# Allegro board ISOLATED_USB_PROGRAMMER_FOR_LPGBT.brd
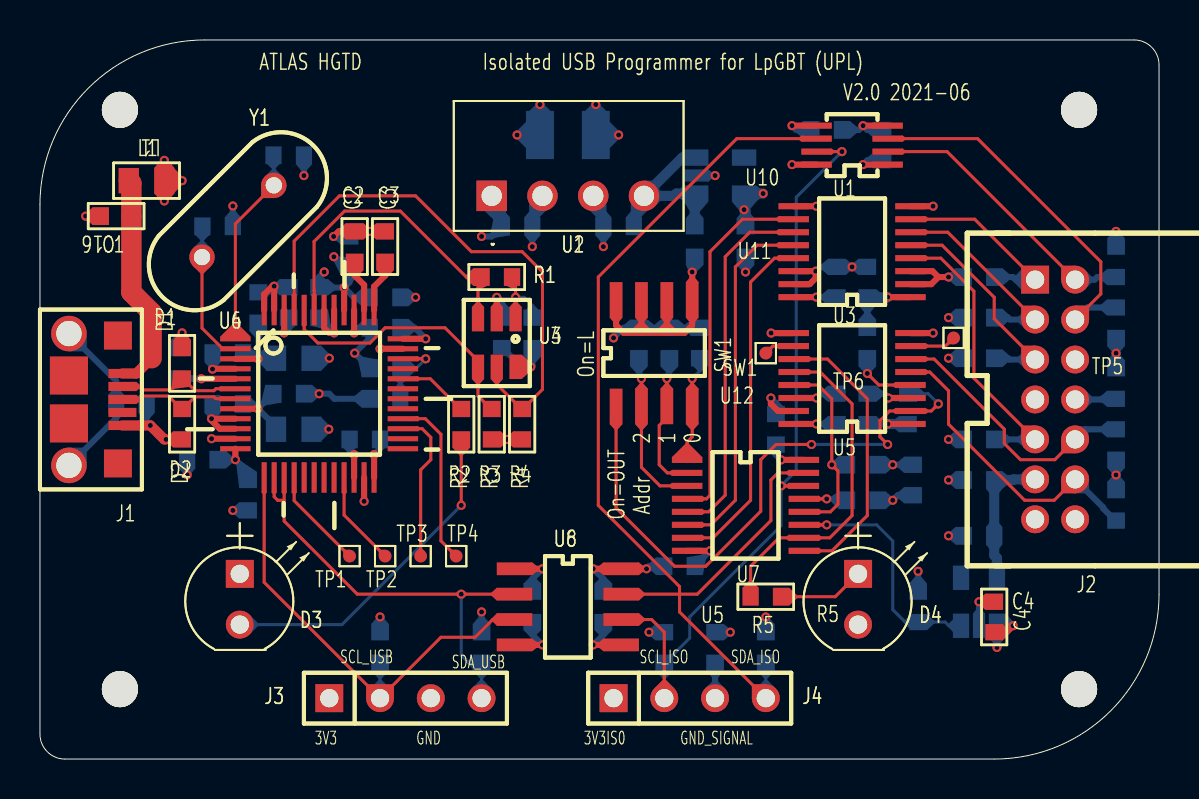
[diagram p0: board, top side]
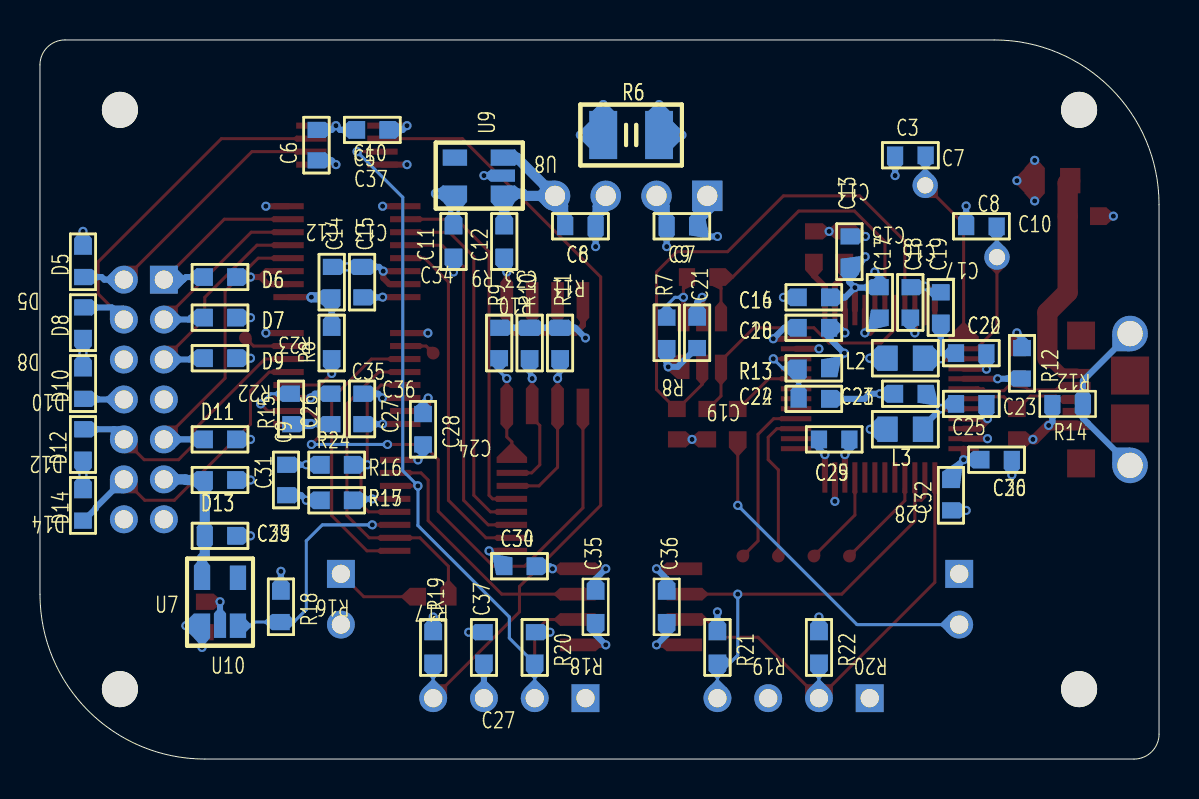
[diagram p1: board, bottom side, seen from below]

Outline 56 x 36 mm; copper layers: TOP, GND, VCC, BOTTOM. Coordinates in mm from the lower left corner of the outline.
Outline path: 0,27.75 0,1.25 arc(0.37,0.37) 1.25,0 47.75,0 arc(53.58,2.42) 56,8.25 56,34.75 arc(55.63,35.63) 54.75,36 8.25,36 arc(2.42,33.58) 0,27.75

## Design rules (mm)
net group DIFFPAIR0: nets N01399 N01437

## Placement (name value [footprint] x y rotation side)
C1  0.01u/0603  [SC0603]  3.81 27.18 180 top
C2  0.1u/0603  [SC0603]  15.75 25.65 270 top
C3  0.1u/0603  [SC0603]  17.27 25.65 270 top
C4  4.7u/0603  [SC0603]  47.75 7.11 270 top
C5  0.1u/0603  [SC0603]  39.37 31.5 0 bottom
C6  4.7u/0603  [SC0603]  42.16 30.73 270 bottom
C7  27p/0603  [SC0603]  12.45 30.23 180 bottom
C8  4.7u/0603  [SC0603]  28.96 26.67 180 bottom
C9  4.7u/0603  [SC0603]  23.88 26.67 180 bottom
C10  27p/0603  [SC0603]  8.89 26.67 180 bottom
C11  4.7u/0603  [SC0603]  35.31 25.91 270 bottom
C12  4.7u/0603  [SC0603]  32.77 25.91 90 bottom
C13  0.01u/0603  [SC0603]  15.49 25.4 90 bottom
C14  0.1u/0603  [SC0603]  41.4 23.88 270 bottom
C15  0.1u/0603  [SC0603]  39.88 23.88 270 bottom
C16  4.7u/0603  [SC0603]  17.27 23.11 0 bottom
C17  0.1u/0603  [SC0603]  13.97 22.86 270 bottom
C18  0.1u/0603  [SC0603]  12.45 22.86 90 bottom
C19  0.1u/0603  [SC0603]  10.92 22.61 90 bottom
C20  0.1u/0603  [SC0603]  17.27 21.59 0 bottom
C21  0.1u/0603  [SC0603]  23.11 21.34 270 bottom
C22  4.7u/0603  [SC0603]  9.4 20.32 180 bottom
C23  0.1u/0603  [SC0603]  12.45 18.29 0 bottom
C24  10n/0603  [SC0603]  17.27 18.03 180 bottom
C25  4.7u/0603  [SC0603]  9.4 17.78 180 bottom
C26  0.1u/0603  [SC0603]  41.4 17.53 270 bottom
C27  0.1u/0603  [SC0603]  39.88 17.53 270 bottom
C28  0.1u/0603  [SC0603]  36.83 16.51 90 bottom
C29  0.1u/0603  [SC0603]  16.26 16 180 bottom
C30  4.7u/0603  [SC0603]  8.13 14.99 180 bottom
C31  0.1u/0603  [SC0603]  43.69 13.97 90 bottom
C32  0.1u/0603  [SC0603]  10.41 13.21 270 bottom
C33  4.7u/0603  [SC0603]  46.99 11.18 180 bottom
C34  0.1u/0603  [SC0603]  32 9.65 0 bottom
C35  0.1u/0603  [SC0603]  28.19 7.62 270 bottom
C36  0.1u/0603  [SC0603]  24.64 7.62 270 bottom
C37  4.7u/0603  [SC0603]  33.78 5.59 270 bottom
D1  576-AXGD10603MR  [SC0603]  7.11 19.81 270 top
D2  576-AXGD10603MR  [SC0603]  7.11 16.76 90 top
D3  RED  [LED]  10 8 0 top
D4  GREEN  [LED]  40.94 8 0 top
D5  576-AXGD10603MR  [SC0603]  53.85 24.89 270 bottom
D6  576-AXGD10603MR  [SC0603]  46.99 24.13 0 bottom
D7  576-AXGD10603MR  [SC0603]  46.99 22.1 0 bottom
D8  576-AXGD10603MR  [SC0603]  53.85 21.84 90 bottom
D9  576-AXGD10603MR  [SC0603]  46.99 20.07 0 bottom
D10  576-AXGD10603MR  [SC0603]  53.85 18.8 270 bottom
D11  576-AXGD10603MR  [SC0603]  46.99 16 0 bottom
D12  576-AXGD10603MR  [SC0603]  53.85 15.75 90 bottom
D13  576-AXGD10603MR  [SC0603]  46.99 13.97 0 bottom
D14  576-AXGD10603MR  [SC0603]  53.85 12.7 270 bottom
J1  10118193-0001LF  [USB_MICRO]  1.45 18 270 top
J2  -  [87833-1420]  50.8 18 270 top
J3  SIP4  [SIP-4P]  18.29 3.05 0 top
J4  SIP4  [SIP-4P]  32.51 3.05 0 top
L1  MMZ2012R601A  [SL0805]  5.33 28.96 180 top
L2  MMZ2012R601A  [SL0805]  12.7 20.07 180 bottom
L3  MMZ2012R601A  [SL0805]  12.7 16.51 180 bottom
NOREF  -  [unnamed]  4 3.5 0 top
NOREF#2  -  [#2]  52 3.5 90 top
NOREF#3  -  [#2]  0 27.75 0 top
NOREF#4  -  [unnamed]  52 32.5 0 top
NOREF#5  -  [#2]  4 32.5 0 top
NOREF#6  -  [#2]  47.75 0 90 top
NOREF#7  -  [unnamed]  52 3.5 0 top
NOREF#8  -  [unnamed]  4 32.5 0 top
R1  2k/0603  [SC0603]  22.86 24.13 0 top
R2  220/0603  [SC0603]  21.08 16.76 270 top
R3  10k/0603  [SC0603]  22.61 16.76 270 top
R4  10k/0603  [SC0603]  24.13 16.76 270 top
R5  220/0603  [SC0603]  36.32 8.13 180 top
R6  10M/1210  [SC1210]  26.42 31.24 180 bottom
R7  10k/0603  [SC0603]  24.64 21.34 270 bottom
R8  220/0603  [SC0603]  41.4 20.83 90 bottom
R9  10k/0603  [SC0603]  33.02 20.83 270 bottom
R10  10k/0603  [SC0603]  31.5 20.83 270 bottom
R11  10k/0603  [SC0603]  29.97 20.83 270 bottom
R12  12k/0603  [SC0603]  6.86 19.81 90 bottom
R13  10k/0603  [SC0603]  17.27 19.56 180 bottom
R14  10M/0603  [SC0603]  4.57 17.78 180 bottom
R15  10k/0603  [SC0603]  43.43 17.53 90 bottom
R16  10k/0603  [SC0603]  41.15 14.73 180 bottom
R17  10k/0603  [SC0603]  41.15 12.95 180 bottom
R18  4.7k/0603  [SC0603]  43.94 7.62 270 bottom
R19  4.7k/0603  [SC0603]  36.32 5.59 90 bottom
R20  4.7k/0603  [SC0603]  31.24 5.59 90 bottom
R21  4.7k/0603  [SC0603]  22.1 5.59 90 bottom
R22  4.7k/0603  [SC0603]  17.02 5.59 90 bottom
SW1  A6H-4102  [SOP8-50-150]  30.73 20.32 0 top
TP1  TP1  [TP-SMD]  45.72 21.08 0 top
TP2  TP1  [TP-SMD]  36.32 20.32 0 top
TP3  TP1  [TP-SMD]  15.49 10.16 0 top
TP4  TP1  [TP-SMD]  17.27 10.16 0 top
TP5  TP1  [TP-SMD]  19.05 10.16 0 top
TP6  TP1  [TP-SMD]  20.83 10.16 0 top
U1  TCA9517DGKR  [SOP8-26-118]  40.64 30.73 90 top
U2  RO-0505S  [RO0533S]  22.61 28.19 0 top
U3  SN74AXC4T245PWR  [SOP16-26-173]  40.64 25.4 90 top
U4  93LC56BT_I/OT  [SOT23-6]  22.86 20.83 180 top
U5  SN74AXC4T245PWR  [SOP16-26-173]  40.64 19.05 90 top
U6  FT232HL  [QFP48-050-0707L]  13.97 18.29 270 top
U7  TCA9554APWR  [SOP16-26-173]  35.31 12.7 270 top
U8  ADUM1251ARZ  [SOP8-50-150]  26.42 7.62 270 top
U9  TPS7A2033PDBVR  [SOT23-5]  34.04 29.21 90 bottom
U10  TPS7A2025PDBVR  [SOT23-5]  46.99 7.87 180 bottom
Y1  9B-12.000MEEJ-B  [XTAL2-200A]  9.91 26.92 45 top

## Library data of the parts
C1-C37 = CAP NP
D1 D2 D5-D14 = DIODE TVS BI-DIR
D3 D4 = LED_0
J1 = USB_Micro_AB
J2 = CONN TRBLK 7X2
J3 J4 = CON4
L1-L3 = INDUCTOR FERRITE
R1-R22 = R
SW1 = SW DIP-4/SM_0
TP1-TP6 = TEST POINT
U1 = TCA9517DGKR
U2 = RW-053_2.3S
U3 U5 = SN74AXC4T245PWR
U4 = 93LC56BT_I/OT
U6 = FT232HL_1
U7 = TCA9554APWR
U8 = ADuM1251ARZ_0
U9 U10 = 93LC56BT_I/OT_0
Y1 = ZTA

## Footprints (pads in the part's own frame, mm; a bottom-side part is the same pattern mirrored in y, then rotated)
87833-1420
  rect 1.397x1.397 hole 0.914: 1(-5.999,-1.001)
  round 1.397 hole 0.914: 2(-5.999,1.001) 3(-4,-1.001) 4(-4,1.001) 5(-1.999,-1.001) 6(-1.999,1.001) 7(0,-1.001) 8(0,1.001) 9(1.999,-1.001) 10(1.999,1.001) 11(4,-1.001) 12(4,1.001) 13(5.999,-1.001) 14(5.999,1.001)
LED
  rect 1.397x1.397 hole 0.914: 1(0,1.27)
  round 1.397 hole 0.914: 2(0,-1.27)
QFP48-050-0707L
  rect 0.254x1.524 smd: 1(-2.751,-4.191) 2(-2.25,-4.191) 3(-1.75,-4.191) 4(-1.25,-4.191) 5(-0.749,-4.191) 6(-0.249,-4.191) 7(0.249,-4.191) 8(0.749,-4.191) 9(1.25,-4.191) 10(1.75,-4.191) 11(2.25,-4.191) 12(2.751,-4.191) 25(2.751,4.191) 26(2.25,4.191) 27(1.75,4.191) 28(1.25,4.191) 29(0.749,4.191) 30(0.249,4.191) 31(-0.249,4.191) 32(-0.749,4.191) 33(-1.25,4.191) 34(-1.75,4.191) 35(-2.25,4.191) 36(-2.751,4.191)
  rect 1.524x0.254 smd: 13(4.191,-2.751) 14(4.191,-2.25) 15(4.191,-1.75) 16(4.191,-1.25) 17(4.191,-0.749) 18(4.191,-0.249) 19(4.191,0.249) 20(4.191,0.749) 21(4.191,1.25) 22(4.191,1.75) 23(4.191,2.25) 24(4.191,2.751) 37(-4.191,2.751) 38(-4.191,2.25) 39(-4.191,1.75) 40(-4.191,1.25) 41(-4.191,0.749) 42(-4.191,0.249) 43(-4.191,-0.249) 44(-4.191,-0.749) 45(-4.191,-1.25) 46(-4.191,-1.75) 47(-4.191,-2.25) 48(-4.191,-2.751)
RO0533S
  rect 1.524x1.524 hole 1.016: 1(0,0)
  round 1.524 hole 1.016: 2(2.54,0) 3(5.08,0) 4(7.62,0)
SC0603
  rect 0.813x0.889 smd: 1(-0.762,0) 2(0.762,0)
SC1210
  rect 1.397x2.413 smd: 1(-1.397,0) 2(1.397,0)
SIP-4P
  rect 1.397x1.397 hole 0.914: 1(-3.81,0)
  round 1.397 hole 0.914: 2(-1.27,0) 3(1.27,0) 4(3.81,0)
SL0805
  rect 1.016x1.27 smd: 1(-0.889,0) 2(0.889,0)
SOP8-26-118
  rect 0.305x1.524 smd: 1(-0.975,-1.778) 2(-0.325,-1.778) 3(0.325,-1.778) 4(0.975,-1.778) 5(0.975,1.778) 6(0.325,1.778) 7(-0.325,1.778) 8(-0.975,1.778)
SOP8-50-150
  rect 0.635x1.778 smd: 1(-1.905,-2.667) 2(-0.635,-2.667) 3(0.635,-2.667) 4(1.905,-2.667) 5(1.905,2.667) 6(0.635,2.667) 7(-0.635,2.667) 8(-1.905,2.667)
SOP16-26-173
  rect 0.305x1.524 smd: 1(-2.276,-2.921) 2(-1.626,-2.921) 3(-0.975,-2.921) 4(-0.325,-2.921) 5(0.325,-2.921) 6(0.975,-2.921) 7(1.626,-2.921) 8(2.276,-2.921) 9(2.276,2.921) 10(1.626,2.921) 11(0.975,2.921) 12(0.325,2.921) 13(-0.325,2.921) 14(-0.975,2.921) 15(-1.626,2.921) 16(-2.276,2.921)
SOT23-5
  rect 0.813x1.219 smd: 1(-0.899,-1.199) 3(0.899,-1.199) 4(0.899,1.199) 5(-0.899,1.199)
  rect 0.61x1.219 smd: 2(0,-1.199)
SOT23-6
  rect 0.61x1.219 smd: 1(-0.94,-1.194) 2(0,-1.194) 3(0.94,-1.194) 4(0.94,1.194) 5(0,1.194) 6(-0.94,1.194)
TP-SMD
  round 0.635 smd: 1(0,0)
unnamed
  round 1.801 hole 1.801 unplated: (0,0)
USB_MICRO
  rect 1.397x1.397 smd: (-3.2,2.451) (3.2,2.451)
  rect 1.905x1.905 smd: (-1.199,0) (1.199,0)
  rect 0.457x1.397 smd: 1(-1.3,2.675) 2(-0.65,2.675) 3(0,2.675) 4(0.65,2.675) 5(1.3,2.675)
  round 1.778 hole 1.27: 6(-3.299,0) 7(3.299,0)
XTAL2-200A
  round 1.27 hole 0.813: 1(-2.54,0) 2(2.54,0)

## Nets
1V2ISO: C6.2 C14.2 C26.2 D10.2 J2.8 R8.2 R15.1 U1.1(VCCA) U3.1(VCCA) U5.1(VCCA)
1V2ON_3V3: R16.2 U5.13(1B1) U7.12(P7)
3V3: C18.1 C20.1 C21.2 C29.1 C30.1 C32.1 C36.1 D3.1(ANODE) J3.1 L2.1 L3.1 R3.2 R4.2 R7.2 R13.2 R21.2 R22.2 U4.6(VCC) U6.12(VCCIO#12) U6.24(VCCIO#24) U6.39(VCCD) U6.46(VCCIO#46) U8.1(VDD1)
3V3ISO: C4.2 C5.1 C11.1 C15.2 C27.2 C28.1 C31.1 C34.1 C35.1 C37.1 J4.1 R9.1 R10.1 R11.1 R17.1 R19.2 R20.2 U1.5(EN) U1.8(VCCB) U3.16(VCCB) U5.16(VCCB) U7.16(VCC) U8.8(VDD2) U9.5(OUT) U10.1(IN)
5V: C9.1 C13.1 C16.1 C17.1 L1.1 U2.2(+VIN) U6.40(VREGIN)
5VISO: C8.1 C12.2 U2.4(+VOUT) U9.1(IN) U9.3(EN)
GND: C1.2 C2.1 C3.1 C7.1 C9.2 C10.1 C13.2 C16.2 C17.2 C18.2 C19.2 C20.2 C21.1 C22.2 C23.2 C24.2 C25.2 C29.2 C30.2 C32.2 C36.2 D1.1 D2.1 J1.5(G) J3.3 R6.2 R12.2 R14.1 U2.1(-VIN) U4.2(VSS/GND) U6.4(AGND#4) U6.9(AGND#9) U6.10(GND#10) U6.11(GND#11) U6.22(GND#22) U6.23(GND#23) U6.35(GND#35) U6.36(GND#36) U6.41(AGND#41) U6.42(TEST) U6.47(GND#47) U6.48(GND#48) U8.4(GND1)
GND SIGNAL: C4.1 C5.2 C6.1 C8.2 C11.2 C12.1 C14.1 C15.1 C26.1 C27.1 C28.2 C31.2 C33.2 C34.2 C35.2 C37.2 D4.2(CATHODE) D5.1 D6.1 D7.1 D8.1 D9.1 D10.1 D11.1 D12.1 D13.1 D14.1 J2.6 J2.14 J4.3 R6.1 R16.1 R18.1 SW1.5(A5) SW1.6(A6) SW1.7(A7) SW1.8(A8) U1.4(GND) U2.3(-VOUT) U3.2(1DIR) U3.3(2DIR) U3.8(GND#8) U3.9(GND#9) U3.14(2O\E\) U3.15(1O\E\) U5.3(2DIR) U5.8(GND#8) U5.9(GND#9) U5.14(2O\E\) U5.15(1O\E\) U7.8(GND) U8.5(GND2) U9.2(GND) U10.2(GND)
GND_EARTH: J1.6(S1) J1.7(S2) R14.2
A0: R9.2 SW1.4(A4) U7.1(A0)
A1: R10.2 SW1.3(A3) U7.2(A1)
A2: R11.2 SW1.2(A2) U7.3(A2)
CLK: R3.1 U4.4(CLK) U6.44(EECLK)
CS: R4.1 U4.5(CS) U6.45(EECS)
DI: R1.1 U4.3(DI) U6.43(EEDATA)
DIR: R15.2 SW1.1(A1) U5.2(1DIR)
DO: R1.2 R7.1 U4.1(DO)
EFUSE2V5: C33.1 D13.2 J2.11 U10.5(OUT)
EFUSEEN_3V3: R18.2 U7.11(P6) U10.3(EN)
MODE0: D6.2 J2.1 U3.7(2A2)
MODE0_3V3: U3.10(2B2) U7.4(P0)
MODE1: D7.2 J2.3 U3.6(2A1)
MODE1_3V3: U3.11(2B1) U7.5(P1)
MODE2: D9.2 J2.5 U3.5(1A2)
MODE2_3V3: U3.12(1B2) U7.6(P2)
MODE3: D11.2 J2.9 U3.4(1A1)
MODE3_3V3: U3.13(1B1) U7.7(P3)
READY: D14.2 J2.12 U5.5(1A2)
READY_3V3: R5.2 U5.12(1B2) U7.10(P5)
RST#: C24.1 R13.1 U6.34(RST#)
RSTB: D12.2 J2.10 U5.6(2A1)
RSTB_3V3: U5.11(2B1) U7.9(P4)
SCL: D5.2 J2.2 U1.2(SCLA)
SCL_ISO: J4.2 R20.1 U1.7(SCLB) U7.14(SCL) U8.6(SCL2)
SCL_USB: J3.2 R22.1 U6.13(ADBUS0) U8.3(SCL1)
SDA: D8.2 J2.4 U1.3(SDAA)
SDA_ISO: J4.4 R19.1 U1.6(SDAB) U7.15(SDA) U8.7(SDA2)
SDA_USB: J3.4 R21.1 U6.14(ADBUS1) U6.15(ADBUS2) U8.2(SDA1)
VPHY: C19.1 C22.1 L2.2 U6.3(VPHY)
VPLL: C23.1 C25.1 L3.2 U6.8(VPLL)
N01399: D1.2 J1.2(D-) U6.6(DM)
N01437: D2.2 J1.3(D+) U6.7(DP)
N01753: C1.1 J1.1(V) L1.2
N03059: C7.2 U6.1(XCSI) Y1.2
N03372: C10.2 U6.2(XCSO) Y1.1
N012748: TP3.1 U6.16(ADBUS3)
N52981: R2.1 U6.32(ACBUS8)
N0127413: TP4.1 U6.21(ACBUS0)
N0127416: TP5.1 U6.27(ACBUS3)
N0127417: TP6.1 U6.28(ACBUS4)
N0127441: R12.1 U6.5(REF)
N16604133: C3.2 U6.37(VCCA)
N16618490: C2.2 U6.38(VCCCORE)
N16623269: D3.2(CATHODE) R2.2
N16736034: R17.2 U7.13(I\N\T\)
N167728930: D4.1(ANODE) R5.1
N168019541: R8.1 U5.4(1A1)
N168019544: TP1.1 U5.7(2A2)
N168019549: TP2.1 U5.10(2B2)

Pads without a net: J1 4; J2 7 13; U6 17 18 19 20 25 26 29 30 31 33; U9 4; U10 4

## Via types
v1: diameter 0.457, hole 0.254, TOP to BOTTOM, 113 vias

## Routing (per net, layer and track width the routed paths; a pad name or vN(x,y) marks a point on that pad's centre or on a via; arc(x,y) is an arc through that point)
1V2ISO: length 20.8
  TOP w0.305: U5.1 v1(42.43,16.77) ; U1.1 v1(41.19,29.76) ; U3.1 v1(42.42,23.12)
  VCC w0.305: v1(42.43,16.77) 42.77,17.11 ; v1(42.43,16.77) 42.09,17.11 ; v1(42.43,16.77) 42.77,16.43 ; v1(42.43,16.77) 42.09,16.43 ; 51.13,18.67 J2.8 ; J2.8 52.47,17.33 ; J2.8 51.13,17.33 ; J2.8 52.47,18.67 ; v1(41.19,29.76) 41.53,29.42 ; v1(41.19,29.76) 41.53,30.1 ; v1(41.19,29.76) 40.85,29.42 ; v1(41.19,29.76) 40.85,30.1 ; v1(42.42,23.12) 42.76,23.46 ; v1(42.42,23.12) 42.08,23.46 ; v1(42.42,23.12) 42.76,22.78 ; v1(42.42,23.12) 42.08,22.78
  BOTTOM w0.305: D10.2 53.12,18.03 53.09,18 J2.8 ; v1(42.43,16.77) 42.42,16.76 C26.2 ; v1(41.19,29.76) 41.4,29.97 C6.2 ; R8.2 C14.2
  BOTTOM w0.508: R15.1 43.44,16.77 v1(42.43,16.77) ; v1(42.42,23.12) 42.41,23.11 C14.2
1V2ON_3V3: length 10.2
  TOP w0.152: U7.12 39.55,12.37 39.93,12.75 39.93,14.42 v1(39.62,14.73) 39.62,18.03 38.93,18.72 U5.13
  BOTTOM w0.152: R16.2 v1(39.62,14.73)
3V3: length 53.5
  TOP w0.305: U6.12 v1(9.78,14.99) ; U6.46 v1(12.22,21.34) ; R3.2 v1(23.37,16) R4.2 ; U6.39 v1(15.72,21.34) ; 23.75,9.53 v1(25.15,9.53) ; U4.6 v1(24.56,19.63) ; 16.72,14.1 v1(16.72,15.24)
  VCC w0.305: v1(24.56,19.63) 24.9,19.97 ; v1(24.56,19.63) 24.22,19.29 ; v1(24.56,19.63) 24.9,19.29 ; v1(24.56,19.63) 24.22,19.97 ; v1(12.22,21.34) 12.56,21 ; v1(12.22,21.34) 12.56,21.68 ; v1(12.22,21.34) 11.88,21 ; v1(12.22,21.34) 11.88,21.68 ; v1(14.48,20.07) 14.82,20.41 ; v1(14.48,20.07) 14.82,19.73 ; v1(14.48,20.07) 14.14,20.41 ; v1(14.48,20.07) 14.14,19.73 ; 15.41,20.66 v1(15.75,20.32) ; v1(15.75,20.32) 15.41,19.98 ; v1(15.75,20.32) 16.09,19.98 ; v1(15.75,20.32) 16.09,20.66 ; 16.38,14.9 v1(16.72,15.24) ; v1(16.72,15.24) 17.06,15.58 ; v1(16.72,15.24) 16.38,15.58 ; v1(16.72,15.24) 17.06,14.9 ; 21.76,7.03 v1(22.1,7.37) ; v1(22.1,7.37) 21.76,7.71 ; v1(22.1,7.37) 22.44,7.03 ; v1(22.1,7.37) 22.44,7.71 ; v1(23.37,16) 23.71,15.66 ; v1(23.37,16) 23.03,16.34 ; v1(23.37,16) 23.03,15.66 ; v1(23.37,16) 23.71,16.34 ; J3.1 15.15,2.37 ; J3.1 15.15,3.72 ; J3.1 13.8,2.37 ; J3.1 13.8,3.72 ; v1(25.15,9.53) 25.49,9.18 ; v1(25.15,9.53) 24.81,9.18 ; v1(25.15,9.53) 24.81,9.87 ; v1(25.15,9.53) 25.49,9.87 ; v1(17.02,7.11) 17.36,7.45 ; v1(17.02,7.11) 17.36,6.77 ; v1(17.02,7.11) 16.68,6.77 ; v1(17.02,7.11) 16.68,7.45 ; 14.11,16.85 v1(14.45,16.51) ; v1(14.45,16.51) 14.79,16.17 ; v1(14.45,16.51) 14.11,16.17 ; v1(14.45,16.51) 14.79,16.85 ; 15.38,21 v1(15.72,21.34) ; v1(15.72,21.34) 15.38,21.68 ; v1(15.72,21.34) 16.06,21.68 ; v1(15.72,21.34) 16.06,21 ; 9.33,9.94 10,9.27 ; 10,9.27 10.67,9.94 ; 10,9.27 10.67,8.6 ; 10,9.27 9.33,8.6 ; 9.44,15.33 v1(9.78,14.99) ; v1(9.78,14.99) 10.12,14.65 ; v1(9.78,14.99) 10.12,15.33 ; v1(9.78,14.99) 9.44,14.65
  BOTTOM w0.305: C32.1 10.41,14.35 v1(9.78,14.99) C30.1 ; C29.1 17.02,15.54 v1(16.72,15.24) ; C21.2 23.15,20.57 24.09,19.63 v1(24.56,19.63) 24.64,19.71 R7.2 ; L3.1 v1(14.45,16.51) ; v1(12.22,21.34) 12.45,21.56 C18.1 ; v1(25.15,9.53) 24.64,9.02 C36.1 ; R22.2 v1(17.02,7.11) ; R21.2 v1(22.1,7.37) ; L2.1 v1(14.48,20.07) ; v1(15.72,21.34) 15.97,21.59 C20.1 16.51,21.08 v1(15.75,20.32) R13.2
3V3ISO: length 63.7
  TOP w0.305: U1.8 v1(37.63,29.76) ; C4.2 48.37,6.35 v1(48.7,6.68) ; v1(30.35,9.53) U8.8 v1(27.69,9.53) ; U1.5 v1(37.63,31.71) ; U3.16 v1(38.85,23.12) ; U5.16 v1(38.85,16.77) ; v1(37.08,14.98) U7.16
  VCC w0.305: v1(36.32,7.11) 36.66,7.45 ; v1(36.32,7.11) 35.98,6.77 ; v1(36.32,7.11) 35.98,7.45 ; v1(36.32,7.11) 36.66,6.77 ; 28.36,21.42 v1(28.7,21.08) ; v1(28.7,21.08) 29.04,21.42 ; v1(28.7,21.08) 28.36,20.74 ; v1(28.7,21.08) 29.04,20.74 ; 37.29,32.05 v1(37.63,31.71) ; v1(37.63,31.71) 37.29,31.37 ; v1(37.63,31.71) 37.97,31.37 ; v1(37.63,31.71) 37.97,32.05 ; 28.03,3.72 J4.1 ; J4.1 29.38,2.37 ; J4.1 29.38,3.72 ; J4.1 28.03,2.37 ; v1(30.48,6.35) 30.82,6.01 ; v1(30.48,6.35) 30.14,6.01 ; v1(30.48,6.35) 30.82,6.69 ; v1(30.48,6.35) 30.14,6.69 ; v1(37.63,29.76) 37.97,29.42 ; v1(37.63,29.76) 37.97,30.1 ; v1(37.63,29.76) 37.29,29.42 ; v1(37.63,29.76) 37.29,30.1 ; 48.36,6.33 v1(48.7,6.68) ; v1(48.7,6.68) 49.04,6.33 ; v1(48.7,6.68) 49.04,7.02 ; v1(48.7,6.68) 48.36,7.02 ; v1(47.89,5.59) 48.23,5.25 ; v1(47.89,5.59) 48.23,5.93 ; v1(47.89,5.59) 47.55,5.25 ; v1(47.89,5.59) 47.55,5.93 ; v1(38.85,23.12) 39.19,23.46 ; v1(38.85,23.12) 38.51,23.46 ; v1(38.85,23.12) 39.19,22.78 ; v1(38.85,23.12) 38.51,22.78 ; 34.2,6.69 v1(34.54,6.35) ; v1(34.54,6.35) 34.88,6.69 ; v1(34.54,6.35) 34.2,6.01 ; v1(34.54,6.35) 34.88,6.01 ; 27.35,9.87 v1(27.69,9.53) ; v1(27.69,9.53) 28.03,9.18 ; v1(27.69,9.53) 27.35,9.18 ; v1(27.69,9.53) 28.03,9.87 ; 35.84,27.97 v1(36.18,28.31) ; v1(36.18,28.31) 35.84,28.65 ; v1(36.18,28.31) 36.53,27.97 ; v1(36.18,28.31) 36.53,28.65 ; 36.74,15.32 v1(37.08,14.98) ; v1(37.08,14.98) 37.42,14.64 ; v1(37.08,14.98) 36.74,14.64 ; v1(37.08,14.98) 37.42,15.32 ; 34.89,27.16 v1(35.23,27.5) ; v1(35.23,27.5) 35.58,27.16 ; v1(35.23,27.5) 35.58,27.84 ; v1(35.23,27.5) 34.89,27.84 ; v1(42.67,12.95) 43.01,13.29 ; v1(42.67,12.95) 42.33,12.61 ; v1(42.67,12.95) 43.01,12.61 ; v1(42.67,12.95) 42.33,13.29 ; 38.51,16.43 v1(38.85,16.77) ; v1(38.85,16.77) 39.19,16.43 ; v1(38.85,16.77) 39.19,17.11 ; v1(38.85,16.77) 38.51,17.11 ; v1(30.35,9.53) 30.69,9.18 ; v1(30.35,9.53) 30.69,9.87 ; v1(30.35,9.53) 30.01,9.87 ; v1(30.35,9.53) 30.01,9.18
  BOTTOM w0.305: C28.1 36.83,15.23 v1(37.08,14.98) ; v1(38.85,23.12) 38.86,23.11 C15.2 ; v1(28.7,21.08) 29.21,21.59 R11.1 R10.1 R9.1 ; v1(27.69,9.53) 28.19,9.02 C35.1 ; R20.2 v1(30.48,6.35) ; C5.1 37.85,31.5 v1(37.63,31.71) ; R19.2 v1(36.32,7.11) ; v1(38.85,16.77) 38.86,16.76 C27.2 ; v1(48.7,6.68) U10.1 v1(47.89,5.59) ; C31.1 42.93,13.21 v1(42.67,12.95) R17.1 ; C34.1 30.48,9.65 v1(30.35,9.53) ; C37.1 v1(34.54,6.35)
  BOTTOM w0.508: C11.1 35.31,27.43 v1(35.23,27.5) U9.5 v1(36.18,28.31)
5V: length 30.1
  TOP w0.305: L1.1 v1(6.22,29.97) ; L1.1 v1(7.11,28.96) ; L1.1 v1(6.22,27.94) ; U6.40 v1(15.22,23.6)
  VCC w0.305: 14.37,24.81 v1(14.71,25.15) ; v1(14.71,25.15) 15.05,25.49 ; v1(14.71,25.15) 15.05,24.81 ; v1(14.71,25.15) 14.37,25.49 ; 5.88,27.6 v1(6.22,27.94) ; v1(6.22,27.94) 6.56,28.28 ; v1(6.22,27.94) 6.56,27.6 ; v1(6.22,27.94) 5.88,28.28 ; v1(14.22,24.38) 14.56,24.04 ; v1(14.22,24.38) 13.88,24.72 ; v1(14.22,24.38) 14.56,24.72 ; v1(14.22,24.38) 13.88,24.04 ; 14.88,23.94 v1(15.22,23.6) ; v1(15.22,23.6) 14.88,23.26 ; v1(15.22,23.6) 15.56,23.94 ; v1(15.22,23.6) 15.56,23.26 ; 5.88,29.63 v1(6.22,29.97) ; v1(6.22,29.97) 5.88,30.31 ; v1(6.22,29.97) 6.56,29.63 ; v1(6.22,29.97) 6.56,30.31 ; v1(24.64,25.65) 24.98,25.99 ; v1(24.64,25.65) 24.3,25.99 ; v1(24.64,25.65) 24.3,25.31 ; v1(24.64,25.65) 24.98,25.31 ; U2.2 25.86,27.48 ; U2.2 24.43,28.91 ; U2.2 24.43,27.48 ; U2.2 25.86,28.91 ; 6.77,29.3 v1(7.11,28.96) ; v1(7.11,28.96) 6.77,28.62 ; v1(7.11,28.96) 7.45,28.62 ; v1(7.11,28.96) 7.45,29.3
  BOTTOM w0.305: v1(14.71,25.15) 15.21,24.64 C13.1 15.49,23.88 v1(15.22,23.6) ; v1(15.22,23.6) 15.71,23.11 C16.1 ; v1(15.22,23.6) 13.99,23.6 C17.1 13.97,24.13 v1(14.22,24.38) ; U2.2 24.64,27.69 C9.1 v1(24.64,25.65)
5VISO: length 9.5
  BOTTOM w0.305: C8.1 29.72,27.69 U2.4
  BOTTOM w0.508: C12.2 32.77,28.24 U9.1 31.85,28.31 31.73,28.19 U2.4 32.14,30.11 U9.3
GND: length 107.6
  TOP w0.305: D1.1 v1(7.11,21.34) ; U6.9 v1(8.59,17.04) 8.59,16.95 8.99,16.54 U6.10 ; U4.2 v1(22.86,23.11) ; 15.72,14.1 v1(15.72,15.24) ; v1(8.64,19.52) 8.65,19.54 U6.4 ; 16.22,14.1 v1(16.22,12.9) ; U6.42 14.22,21.59 14.48,21.34 v1(14.72,21.34) U6.41 ; D2.1 v1(6.31,16) ; v1(14.69,26.16) 14.95,26.42 C2.1 v1(16.51,26.42) C3.1 ; C1.2 v1(2.29,27.18) ; 23.75,5.71 v1(25.15,5.71) ; U6.11 v1(8.59,16.04) ; U6.35 v1(17.02,20.54) ; U6.47 v1(11.72,23.67) 11.63,23.67 11.22,23.26 U6.48 ; U6.36 v1(19.3,21.04)
  TOP w0.508: v1(6.31,16) 6.22,16 v1(5.52,16.7) J1.5
  GND w0.305: v1(14.69,26.16) 15.03,25.82 ; v1(14.69,26.16) 14.35,26.5 ; v1(14.69,26.16) 15.03,26.5 ; v1(14.69,26.16) 14.35,25.82 ; v1(25.02,32.77) 25.36,32.43 ; v1(25.02,32.77) 24.68,32.43 ; v1(25.02,32.77) 24.68,33.11 ; v1(25.02,32.77) 25.36,33.11 ; 14.38,21 v1(14.72,21.34) ; v1(14.72,21.34) 15.06,21.68 ; v1(14.72,21.34) 14.38,21.68 ; v1(14.72,21.34) 15.06,21 ; v1(2.29,27.18) 2.63,26.84 ; v1(2.29,27.18) 1.95,27.52 ; v1(2.29,27.18) 2.63,27.52 ; v1(2.29,27.18) 1.95,26.84 ; 18.46,23.45 v1(18.8,23.11) ; v1(18.8,23.11) 19.14,23.45 ; v1(18.8,23.11) 18.46,22.77 ; v1(18.8,23.11) 19.14,22.77 ; v1(6.31,16) 6.65,16.34 ; v1(6.31,16) 6.65,15.66 ; v1(6.31,16) 5.97,16.34 ; v1(6.31,16) 5.97,15.66 ; v1(22.86,23.11) 23.2,22.77 ; v1(22.86,23.11) 23.2,23.45 ; v1(22.86,23.11) 22.52,23.45 ; v1(22.86,23.11) 22.52,22.77 ; v1(9.65,27.69) 9.99,28.03 ; v1(9.65,27.69) 9.31,27.35 ; v1(9.65,27.69) 9.99,27.35 ; v1(9.65,27.69) 9.31,28.03 ; v1(5.52,16.7) 5.86,16.36 ; v1(5.52,16.7) 5.18,17.04 ; v1(5.52,16.7) 5.18,16.36 ; v1(5.52,16.7) 5.86,17.04 ; v1(13.21,29.21) 13.55,29.55 ; v1(13.21,29.21) 12.87,29.55 ; v1(13.21,29.21) 12.87,28.87 ; v1(13.21,29.21) 13.55,28.87 ; 8.24,15.7 v1(8.59,16.04) ; v1(8.59,16.04) 8.93,15.7 ; v1(8.59,16.04) 8.24,16.38 ; v1(8.59,16.04) 8.93,16.38 ; v1(23.88,31.24) 24.22,31.58 ; v1(23.88,31.24) 23.54,31.58 ; v1(23.88,31.24) 24.22,30.9 ; v1(23.88,31.24) 23.54,30.9 ; 16.68,20.2 v1(17.02,20.54) ; v1(17.02,20.54) 17.36,20.88 ; v1(17.02,20.54) 16.68,20.88 ; v1(17.02,20.54) 17.36,20.2 ; 13.63,18.63 v1(13.97,18.29) ; v1(13.97,18.29) 14.31,17.95 ; v1(13.97,18.29) 14.31,18.63 ; v1(13.97,18.29) 13.63,17.95 ; v1(25.15,5.71) 25.49,5.37 ; v1(25.15,5.71) 25.49,6.06 ; v1(25.15,5.71) 24.81,5.37 ; v1(25.15,5.71) 24.81,6.06 ; v1(22.1,26.16) 22.44,26.5 ; v1(22.1,26.16) 22.44,25.82 ; v1(22.1,26.16) 21.76,26.5 ; v1(22.1,26.16) 21.76,25.82 ; 9.31,12.11 v1(9.65,12.45) ; v1(9.65,12.45) 9.99,12.11 ; v1(9.65,12.45) 9.99,12.79 ; v1(9.65,12.45) 9.31,12.79 ; v1(19.3,21.04) 19.64,20.7 ; v1(19.3,21.04) 19.64,21.38 ; v1(19.3,21.04) 18.96,21.38 ; v1(19.3,21.04) 18.96,20.7 ; v1(8.64,19.52) 8.98,19.18 ; v1(8.64,19.52) 8.3,19.86 ; v1(8.64,19.52) 8.98,19.86 ; 15.38,14.9 v1(15.72,15.24) ; v1(15.72,15.24) 16.06,14.9 ; v1(15.72,15.24) 15.38,15.58 ; v1(15.72,15.24) 16.06,15.58 ; 7.03,14.56 v1(7.37,14.22) ; v1(7.37,14.22) 7.71,13.88 ; v1(7.37,14.22) 7.03,13.88 ; v1(7.37,14.22) 7.71,14.56 ; 16.17,26.08 v1(16.51,26.42) ; v1(16.51,26.42) 16.85,26.08 ; v1(16.51,26.42) 16.17,26.76 ; v1(16.51,26.42) 16.85,26.76 ; 15.88,12.56 v1(16.22,12.9) ; v1(16.22,12.9) 16.56,12.56 ; v1(16.22,12.9) 16.56,13.24 ; v1(16.22,12.9) 15.88,13.24 ; 18.88,3.72 J3.3 ; J3.3 20.23,3.72 ; J3.3 20.23,2.37 ; J3.3 18.88,2.37 ; 21.89,27.48 U2.1 ; U2.1 23.32,28.91 ; U2.1 21.89,28.91 ; U2.1 23.32,27.48 ; 8.24,17.38 v1(8.59,17.04) ; v1(8.59,17.04) 8.24,16.7 ; v1(8.59,17.04) 8.93,17.38 ; v1(8.59,17.04) 8.93,16.7 ; v1(11.72,23.67) 12.06,23.33 ; v1(11.72,23.67) 11.38,23.33 ; v1(11.72,23.67) 11.38,24.01 ; v1(11.72,23.67) 12.06,24.01 ; 6.77,21 v1(7.11,21.34) ; v1(7.11,21.34) 6.77,21.68 ; v1(7.11,21.34) 7.45,21 ; v1(7.11,21.34) 7.45,21.68
  BOTTOM w0.305: C13.2 v1(14.69,26.16) ; C23.2 v1(13.97,18.29) 14.48,18.29 14.73,18.03 C24.2 ; C20.2 18.75,21.59 v1(19.3,21.04) ; C29.2 15.49,15.47 v1(15.72,15.24) ; v1(8.59,17.04) 8.64,17.09 C25.2 ; v1(25.15,5.71) 24.64,6.22 C36.2 ; v1(5.52,16.7) 5.33,16.89 R14.1 ; C7.1 v1(13.21,29.21) ; U2.1 23.11,27.69 C9.2 22.61,26.16 v1(22.1,26.16) ; v1(22.86,23.11) 23.11,22.86 C21.1 ; R12.2 6.86,21.08 v1(7.11,21.34) ; C22.2 v1(8.64,19.52) ; C32.2 v1(9.65,12.45) ; C17.2 13.97,22.09 v1(14.72,21.34) ; C18.2 11.77,23.62 v1(11.72,23.67) 11.41,23.37 C19.2 ; C16.2 v1(18.8,23.11) ; v1(25.02,32.77) R6.2 v1(23.88,31.24) ; C30.2 v1(7.37,14.22) ; C10.1 v1(9.65,27.69)
GND SIGNAL: length 140.1
  TOP w0.305: U5.15 36.93,17.42 36.58,17.78 v1(36.58,18.07) ; U5.3 v1(42.46,18.07) ; U3.15 38.52,23.77 38.82,24.08 v1(38.82,24.42) U3.14 ; SW1.8 28.83,21.72 29.21,21.34 30.1,21.34 ; U3.2 44.6,23.77 44.96,24.13 ; U3.3 44.66,24.42 44.96,24.13 ; 31.37,21.34 32.26,21.34 32.64,21.72 SW1.5 v1(32.64,24.38) ; 31.37,21.34 30.1,21.34 ; 31.37,21.34 31.37,22.99 ; U7.8 v1(33.53,10.42) ; U3.8 v1(44.69,27.68) ; 30.1,21.34 SW1.7 ; U5.14 v1(38.86,18.07) ; U3.9 v1(38.85,27.68) ; U5.8 v1(44.69,21.33) ; 44.96,24.13 v1(45.47,24.13) ; C4.1 v1(46.99,7.87) ; U1.4 v1(41.19,31.71) ; U8.5 v1(27.69,5.71) ; U5.9 v1(36.59,21.33)
  GND w0.305: 28.62,31.58 v1(28.96,31.24) ; v1(28.96,31.24) 28.62,30.9 ; v1(28.96,31.24) 29.3,31.58 ; v1(28.96,31.24) 29.3,30.9 ; v1(40.64,24.64) 40.98,24.98 ; v1(40.64,24.64) 40.98,24.3 ; v1(40.64,24.64) 40.3,24.3 ; v1(40.64,24.64) 40.3,24.98 ; 45.13,13.63 v1(45.47,13.97) ; v1(45.47,13.97) 45.81,13.63 ; v1(45.47,13.97) 45.13,14.31 ; v1(45.47,13.97) 45.81,14.31 ; 36.25,21.67 v1(36.59,21.33) ; v1(36.59,21.33) 36.93,21.67 ; v1(36.59,21.33) 36.93,20.99 ; v1(36.59,21.33) 36.25,20.99 ; 27.35,5.37 v1(27.69,5.71) ; v1(27.69,5.71) 27.35,6.06 ; v1(27.69,5.71) 28.03,5.37 ; v1(27.69,5.71) 28.03,6.06 ; v1(36.58,18.07) 36.92,17.73 ; v1(36.58,18.07) 36.24,18.41 ; v1(36.58,18.07) 36.92,18.41 ; v1(36.58,18.07) 36.24,17.73 ; v1(27.81,32.77) 28.15,32.43 ; v1(27.81,32.77) 27.47,32.43 ; v1(27.81,32.77) 28.15,33.11 ; v1(27.81,32.77) 27.47,33.11 ; 53.51,26.76 v1(53.85,26.42) ; v1(53.85,26.42) 54.19,26.76 ; v1(53.85,26.42) 54.19,26.08 ; v1(53.85,26.42) 53.51,26.08 ; 53.51,20.66 v1(53.85,20.32) ; v1(53.85,20.32) 53.51,19.98 ; v1(53.85,20.32) 54.19,19.98 ; v1(53.85,20.32) 54.19,20.66 ; v1(33.78,29.21) 34.12,29.55 ; v1(33.78,29.21) 33.44,28.87 ; v1(33.78,29.21) 33.44,29.55 ; v1(33.78,29.21) 34.12,28.87 ; 53.51,14.56 v1(53.85,14.22) ; v1(53.85,14.22) 54.19,13.88 ; v1(53.85,14.22) 53.51,13.88 ; v1(53.85,14.22) 54.19,14.56 ; 51.13,12.67 J2.14 ; J2.14 52.47,12.67 ; J2.14 51.13,11.33 ; J2.14 52.47,11.33 ; 45.13,20.41 v1(45.47,20.07) ; v1(45.47,20.07) 45.81,20.41 ; v1(45.47,20.07) 45.81,19.73 ; v1(45.47,20.07) 45.13,19.73 ; J2.6 52.47,19.33 ; J2.6 51.13,19.33 ; J2.6 51.13,20.67 ; J2.6 52.47,20.67 ; v1(44.69,21.33) 45.03,20.99 ; v1(44.69,21.33) 44.35,20.99 ; v1(44.69,21.33) 45.03,21.67 ; v1(44.69,21.33) 44.35,21.67 ; 34.97,24.72 v1(35.31,24.38) ; v1(35.31,24.38) 34.97,24.04 ; v1(35.31,24.38) 35.65,24.04 ; v1(35.31,24.38) 35.65,24.72 ; v1(41.19,31.71) 41.53,31.37 ; v1(41.19,31.71) 40.85,32.05 ; v1(41.19,31.71) 41.53,32.05 ; v1(41.19,31.71) 40.85,31.37 ; 32.3,24.72 v1(32.64,24.38) ; v1(32.64,24.38) 32.98,24.72 ; v1(32.64,24.38) 32.98,24.04 ; v1(32.64,24.38) 32.3,24.04 ; v1(33.53,10.42) 33.87,10.08 ; v1(33.53,10.42) 33.19,10.08 ; v1(33.53,10.42) 33.19,10.76 ; v1(33.53,10.42) 33.87,10.76 ; v1(28.19,25.65) 28.53,25.31 ; v1(28.19,25.65) 28.53,25.99 ; v1(28.19,25.65) 27.85,25.99 ; v1(28.19,25.65) 27.85,25.31 ; v1(42.67,14.73) 43.01,14.39 ; v1(42.67,14.73) 42.33,14.39 ; v1(42.67,14.73) 42.33,15.07 ; v1(42.67,14.73) 43.01,15.07 ; 42.12,18.41 v1(42.46,18.07) ; v1(42.46,18.07) 42.8,18.41 ; v1(42.46,18.07) 42.12,17.73 ; v1(42.46,18.07) 42.8,17.73 ; 45.13,15.66 v1(45.47,16) ; v1(45.47,16) 45.13,16.34 ; v1(45.47,16) 45.81,16.34 ; v1(45.47,16) 45.81,15.66 ; 44.35,28.02 v1(44.69,27.68) ; v1(44.69,27.68) 45.03,28.02 ; v1(44.69,27.68) 44.35,27.34 ; v1(44.69,27.68) 45.03,27.34 ; v1(45.47,22.1) 45.81,21.76 ; v1(45.47,22.1) 45.81,22.44 ; v1(45.47,22.1) 45.13,21.76 ; v1(45.47,22.1) 45.13,22.44 ; 43.6,9.74 v1(43.94,9.4) ; v1(43.94,9.4) 44.28,9.06 ; v1(43.94,9.4) 43.6,9.06 ; v1(43.94,9.4) 44.28,9.74 ; v1(45.47,24.13) 45.81,24.47 ; v1(45.47,24.13) 45.13,24.47 ; v1(45.47,24.13) 45.13,23.79 ; v1(45.47,24.13) 45.81,23.79 ; v1(45.47,11.18) 45.81,11.52 ; v1(45.47,11.18) 45.13,10.84 ; v1(45.47,11.18) 45.81,10.84 ; v1(45.47,11.18) 45.13,11.52 ; v1(46.99,7.87) 47.33,7.53 ; v1(46.99,7.87) 46.65,7.53 ; v1(46.99,7.87) 47.33,8.21 ; v1(46.99,7.87) 46.65,8.21 ; 26.97,28.91 U2.3 ; U2.3 26.97,27.48 ; U2.3 28.4,27.48 ; U2.3 28.4,28.91 ; 38.48,24.77 v1(38.82,24.42) ; v1(38.82,24.42) 38.48,24.08 ; v1(38.82,24.42) 39.16,24.08 ; v1(38.82,24.42) 39.16,24.77 ; 33.11,3.72 J4.3 ; J4.3 33.11,2.37 ; J4.3 34.46,3.72 ; J4.3 34.46,2.37 ; v1(38.86,18.07) 39.2,17.73 ; v1(38.86,18.07) 38.52,18.41 ; v1(38.86,18.07) 38.52,17.73 ; v1(38.86,18.07) 39.2,18.41 ; v1(38.85,27.68) 39.19,27.34 ; v1(38.85,27.68) 38.51,28.02 ; v1(38.85,27.68) 38.51,27.34 ; v1(38.85,27.68) 39.19,28.02 ; 40.27,7.4 D4.2 ; D4.2 41.61,7.4 ; D4.2 41.61,6.06 ; D4.2 40.27,6.06
  BOTTOM w0.305: U10.2 v1(46.99,7.87) ; v1(36.58,18.07) 36.83,17.82 C28.2 ; C26.1 42.25,18.29 v1(42.46,18.07) ; v1(27.69,5.71) 28.19,6.22 C35.2 ; v1(33.53,10.42) 32.77,9.66 C34.2 ; C31.2 v1(42.67,14.73) R16.1 ; v1(38.86,18.07) 39.08,18.29 C27.1 ; U9.2 v1(33.78,29.21) ; D6.1 v1(45.47,24.13) ; D14.1 v1(53.85,14.22) D12.1 ; C12.1 32.64,24.99 v1(32.64,24.38) ; v1(27.81,32.77) R6.1 v1(28.96,31.24) ; C11.2 v1(35.31,24.38) ; D11.1 v1(45.47,16) ; U2.3 28.19,27.69 C8.2 v1(28.19,25.65) ; D5.1 v1(53.85,26.42) ; D9.1 v1(45.47,20.07) ; D8.1 v1(53.85,20.32) D10.1 ; C33.2 v1(45.47,11.18) ; C6.1 41.4,31.5 v1(41.19,31.71) 40.98,31.5 C5.2 ; C14.1 v1(40.64,24.64) C15.1 39.03,24.64 v1(38.82,24.42) ; R18.1 v1(43.94,9.4) ; D13.1 v1(45.47,13.97) ; C37.2 J4.3 ; v1(45.47,22.1) D7.1
GND_EARTH: length 8.6
  BOTTOM w0.305: J1.7 3.56,16.81 3.56,16.81 3.81,17.06 R14.2 3.81,18.94 J1.6
A0: length 5.4
  TOP w0.152: v1(32.64,19.05) SW1.4 32.64,16.13 32.38,15.88 U7.1
  BOTTOM w0.152: v1(32.64,19.05) 33.02,19.43 R9.2
A1: length 7.1
  TOP w0.152: v1(31.37,19.05) 31.37,17.08 30.99,16.7 30.99,14.73 31.39,14.33 U7.2
  BOTTOM w0.152: v1(31.37,19.05) 31.5,19.18 R10.2
A2: length 8.2
  TOP w0.152: v1(30.1,19.05) SW1.2 30.1,14.61 31.03,13.68 U7.3
  BOTTOM w0.152: R11.2 29.97,19.18 v1(30.1,19.05)
CLK: length 13.7
  TOP w0.152: U6.44 13.22,21.51 13.91,20.83 16.51,20.83 17.27,21.59 20.27,21.59 21.92,19.94 U4.4 21.92,18.17 22.57,17.53 R3.1
CS: length 28.3
  TOP w0.152: U6.45 12.72,25.93 14.99,28.19 18.8,28.19 21.59,25.4 24.13,25.4 25.15,24.38 25.15,18.5 24.17,17.53 R4.1 24.09,17.53 22.86,18.76 U4.5
DI: length 16
  TOP w0.152: U6.43 13.72,23.44 13.72,23.45 13.72,25.91 15.24,27.43 18.03,27.43 21.34,24.13 R1.1 22.1,23.74 21.92,23.56 U4.3
DIR: length 30.3
  TOP w0.152: v1(42.42,15.75) 42.03,16.13 42.03,16.94 42.52,17.42 U5.2 44.6,17.42 v1(44.96,17.78) ; SW1.1 28.83,12.57 31.75,9.65 33.31,9.65 36.07,12.41 36.07,14.99 36.83,15.75 v1(38.61,15.75)
  BOTTOM w0.152: v1(38.61,15.75) v1(42.42,15.75) ; R15.2 44.45,18.29 v1(44.96,17.78)
DO: length 3.8
  TOP w0.152: R1.2 23.62,23.74 23.8,23.56 v1(23.8,23.11) U4.1
  BOTTOM w0.152: R7.1 24.64,22.71 24.23,23.11 v1(23.8,23.11)
EFUSE2V5: length 7
  BOTTOM w0.508: U10.5 47.89,10.06 47.75,10.2 C33.1 D13.2 48.69,13.97 48.72,14 J2.11
EFUSEEN_3V3: length 12
  TOP w0.152: U7.11 v1(39.37,11.72)
  BOTTOM w0.152: U10.3 45.48,6.68 45.3,6.86 R18.2 43.29,6.86 42.67,7.48 42.67,10.92 41.87,11.72 v1(39.37,11.72)
MODE0: length 9.6
  TOP w0.152: U3.7 46.77,27.03 J2.1
  BOTTOM w0.305: D6.2 48.69,24.13 48.82,24 J2.1
MODE0_3V3: length 18.3
  TOP w0.152: U7.4 33.35,13.03 33.53,13.2 33.53,25.4 35.15,27.03 U3.10
MODE1: length 10.1
  TOP w0.152: J2.3 45.43,26.38 U3.6
  BOTTOM w0.305: D7.2 48.44,22.1 48.53,22 J2.3
MODE1_3V3: length 18.1
  TOP w0.152: U3.11 35.52,26.38 34.29,25.15 34.29,13.21 33.46,12.37 U7.5
MODE2: length 11.3
  TOP w0.152: U3.5 45.14,25.73 47.75,23.11 47.75,22.05 J2.5
  BOTTOM w0.305: D9.2 48.44,20.07 48.5,20 J2.5
MODE2_3V3: length 18
  TOP w0.152: U3.12 35.89,25.73 34.8,24.64 34.8,12.95 33.57,11.72 U7.6
MODE3: length 14.6
  TOP w0.152: J2.9 46.74,19.07 46.74,23.42 45.08,25.07 U3.4
  BOTTOM w0.305: J2.9 D11.2
MODE3_3V3: length 17.5
  TOP w0.152: U3.13 36.75,25.07 35.56,23.88 35.56,12.95 33.68,11.07 U7.7
READY: length 15.2
  TOP w0.152: U5.5 44.53,19.38 45.47,18.44 45.47,16.76 49.28,12.95 50.75,12.95 J2.12
  BOTTOM w0.305: D14.2 53.81,11.94 53.21,12.54 53.21,12.6 J2.12
READY_3V3: length 16.8
  TOP w0.152: U5.12 39.04,19.38 40.64,17.78 40.64,12.19 39.52,11.07 U7.10 36.98,11.07 35.56,9.65 R5.2
RST#: length 4.1
  TOP w0.152: U6.34 v1(19.3,20.04)
  BOTTOM w0.152: v1(19.3,20.04) 18.82,19.56 R13.1 C24.1
RSTB: length 13.4
  TOP w0.152: U5.6 44.74,20.03 48.26,16.51 48.26,15.79 49.07,14.99 50.78,14.99 J2.10
  BOTTOM w0.305: D12.2 52.31,16.51 J2.10
RSTB_3V3: length 14.3
  TOP w0.152: U7.9 39.63,10.42 41.4,12.19 41.4,18.03 39.41,20.03 U5.11
SCL: length 14.1
  TOP w0.152: U1.2 45.39,30.41 J2.2
  BOTTOM w0.305: J2.2 52.78,24 52.91,24.13 D5.2
SCL_ISO: length 39.2
  TOP w0.152: U8.6 30.61,6.99 31.24,6.35 J4.2 ; U7.14 v1(37.08,13.68) ; U1.7 v1(40.13,30.41)
  BOTTOM w0.152: J4.2 R20.1 31.28,4.83 32.51,6.06 32.51,7.11 37.08,11.69 v1(37.08,13.68) 37.85,14.44 37.85,28.12 v1(40.13,30.41)
SCL_USB: length 23.6
  TOP w0.152: 11.22,14.1 11.22,8.85 J3.2 20.07,6.1 21.77,6.1 22.66,6.99 23.75,6.99
  BOTTOM w0.152: R22.1 J3.2
SDA: length 18.9
  TOP w0.152: U1.3 46.92,31.06 53.09,24.89 53.09,23.29 J2.4
  BOTTOM w0.305: J2.4 52.41,22.61 D8.2
SDA_ISO: length 53
  TOP w0.152: 32,8.26 32.89,8.26 36.58,11.94 36.58,13.97 36.93,14.33 U7.15 ; 32,8.26 32,8.64 27.94,12.7 27.94,24.13 34.87,31.06 U1.6 ; 32,8.26 32,7.37 J4.4 ; 32,8.26 U8.7
  BOTTOM w0.152: R19.1 J4.4
SDA_USB: length 22.8
  TOP w0.152: 12.22,12.96 12.22,14.1 ; 12.22,12.96 12.22,11.91 15.88,8.26 v1(21.08,8.26) 23.75,8.26 ; 12.22,12.96 12.19,12.96 12.19,12.95 11.9,12.95 11.72,13.13 11.72,14.1
  BOTTOM w0.152: J3.4 R21.1 21.45,4.83 21.08,5.19 v1(21.08,8.26)
VPHY: length 4.7
  TOP w0.305: U6.3 v1(10.92,20.04)
  BOTTOM w0.305: v1(10.92,20.04) 10.95,20.07 L2.2 ; v1(10.92,20.04) 10.64,20.32 C22.1 ; v1(10.92,20.04) C19.1
VPLL: length 4.5
  TOP w0.305: U6.8 v1(10.91,17.54)
  BOTTOM w0.305: L3.2 11.81,16.64 v1(10.91,17.54) ; C25.1 10.67,17.78 v1(10.91,17.54) ; C23.1 11.66,18.29 v1(10.91,17.54)
N01399: length 6.3
  TOP w0.152: J1.2 4.98,18.65 5.16,18.48 6.54,18.48 D1.2 7.15,19.05 7.76,18.44 8.7,18.44 8.8,18.54 U6.6
N01437: length 6.3
  TOP w0.152: J1.3 4.98,18 5.16,18.17 6.43,18.17 7.07,17.53 D2.2 7.15,17.53 7.76,18.14 8.7,18.14 8.8,18.04 U6.7
N01753: length 11.1
  TOP w0.508: 5.59,20.07 4.82,19.3 J1.1
  TOP w1.016: 5.59,20.07 5.59,22.35 4.57,23.37 C1.1 4.57,28.83 L1.2
N03059: length 10
  TOP w0.152: U6.1 9.78,26.8 Y1.2
  BOTTOM w0.152: Y1.2 11.7,29.56 11.68,29.58 C7.2
N03372: length 7.2
  TOP w0.152: Y1.1 8.11,21.57 9.14,20.54 U6.2
  BOTTOM w0.152: Y1.1 8.11,25.97 8.13,25.99 C10.2
N012748: length 5.1
  TOP w0.152: TP3.1 12.72,12.93 12.72,14.1
N52981: length 3.5
  TOP w0.152: R2.1 21.04,17.53 19.53,19.04 U6.32
N0127413: length 4.8
  TOP w0.152: TP4.1 15.22,12.21 15.22,14.1
N0127416: length 7.7
  TOP w0.152: TP5.1 19.05,14.48 19.56,14.99 19.56,16.11 19.13,16.54 U6.27
N0127417: length 8.6
  TOP w0.152: U6.28 19.28,17.04 20.07,16.26 20.07,10.92 TP6.1
N0127441: length 2.9
  TOP w0.305: v1(8.08,19.04) U6.5
  BOTTOM w0.305: R12.1 7.61,19.05 7.62,19.04 v1(8.08,19.04)
N16604133: length 2.6
  TOP w0.305: C3.2 17.27,24.21 16.72,23.66 U6.37
N16618490: length 2.6
  TOP w0.305: U6.38 16.22,23.73 15.75,24.21 C2.2
N16623269: length 16.9
  TOP w0.152: R2.2 v1(21.08,12.7)
  BOTTOM w0.152: D3.2 15.11,6.73 v1(21.08,12.7)
N16736034: length 2.2
  TOP w0.152: U7.13 v1(39.37,13.03)
  BOTTOM w0.152: R17.2 40.31,13.03 v1(39.37,13.03)
N167728930: length 4.3
  TOP w0.152: 40.94,9.27 39.8,8.13 R5.1
N168019541: length 3.2
  TOP w0.152: U5.4 41.98,18.72 v1(41.4,19.3)
  BOTTOM w0.152: R8.1 v1(41.4,19.3)
N168019544: length 2.3
  TOP w0.152: TP1.1 45.31,20.68 U5.7
N168019549: length 1.5
  TOP w0.152: TP2.1 36.68,20.68 U5.10

## Copper pours and planes (outline as drawn; the poured copper is in the pictures)
1V2ISO on VCC: 54.86,8.25 54.51,6.02 53.49,4.02 40.39,17.12 40.39,35.05 54.86,35.05
3V3 on VCC: 1.02,1.02 1.02,22.35 25.91,22.35 25.91,1.02
3V3ISO on VCC: 26.92,1.02 26.92,35.05 39.88,35.05 39.88,16.91 53.18,3.61 50.69,1.7 47.63,1.02
5V on BOTTOM (solid shape): 25.52,27.66 24.74,26.88 24.64,26.99 24.64,27.69 25.16,28.23
5V on VCC: 1.02,22.86 1.02,27.82 3.13,32.93 8.25,35.05 25.91,35.05 25.91,22.86
5VISO on BOTTOM (solid shape): 30.6,27.66 29.82,26.88 29.72,26.99 29.72,27.69 30.24,28.23
GND on BOTTOM (solid shape): 24.94,32.9 25.02,32.92 25.1,32.9 25.55,32.44 25.02,31.2 24.49,32.44
GND on GND: 0.51,0.51 0.51,27.82 2.78,33.29 8.25,35.56 25.91,35.56 25.91,0.51
GND SIGNAL on BOTTOM (solid shape): 28.19,27.69 28.19,26.99 28.09,26.88 27.32,27.66 27.67,28.23
GND SIGNAL on BOTTOM (solid shape): 27.73,32.9 27.81,32.92 27.89,32.9 28.35,32.44 27.81,31.2 27.28,32.44
GND SIGNAL on GND: 26.92,0.51 26.92,35.56 55.37,35.56 55.37,8.25 53.1,2.78 47.63,0.51
3V3 on TOP (solid shape): 24.68,19.73 24.71,19.63 24.68,19.54 24.1,19.02 23.76,19.63 24.1,20.24
3V3 on BOTTOM (solid shape): 14.58,16.59 14.61,16.51 14.58,16.43 14.1,15.94 13.55,16.51 14.1,17.08
3V3 on BOTTOM (solid shape): 14.61,20.15 14.63,20.07 14.61,19.98 14.1,19.47 13.55,20.07 14.1,20.67
3V3 on BOTTOM (solid shape): 16.92,20 16.54,19.53 16.1,19.11 15.92,19.99 15.96,20.11 16.07,20.15
3V3 on BOTTOM (solid shape): 9.82,14.79 9.89,14.92 10.04,14.93 10.86,14.38 10.43,13.94 9.97,13.56
3V3ISO on BOTTOM (solid shape): 48.82,6.76 48.85,6.68 48.82,6.59 48.3,6.07 47.85,6.68 48.3,7.28
3V3ISO on BOTTOM (solid shape): 35.84,27.9 35.36,27.33 35.23,27.3 35.11,27.33 34.63,27.9 35.23,28.37
5V on TOP (solid shape): 6.14,30.07 6.22,30.1 6.31,30.07 6.73,29.59 6.22,28.92 5.71,29.59
5V on TOP (solid shape): 6.73,28.32 6.31,27.84 6.22,27.82 6.14,27.84 5.71,28.32 6.22,28.99
5V on TOP (solid shape): 7.24,29.04 7.26,28.96 7.24,28.87 6.73,28.36 6.18,28.96 6.73,29.56
5V on BOTTOM (solid shape): 15.94,25.04 15.53,24.62 15.05,24.23 14.66,25 14.69,25.14 14.81,25.2
5VISO on BOTTOM (solid shape): 33.45,27.9 32.9,27.26 32.75,27.23 32.61,27.28 32.23,27.9 32.84,28.37
5VISO on BOTTOM (solid shape): 31.12,28.37 31.2,28.19 31.12,28.01 30.76,27.66 30.16,28.19 30.76,28.73
GND on BOTTOM (solid shape): 25.06,31.24 24.33,30.58 23.75,31.16 23.72,31.24 23.75,31.33 24.33,31.9
GND on BOTTOM (solid shape): 14.56,21.64 14.52,21.53 14.4,21.49 13.53,21.69 13.94,22.13 14.41,22.5
GND on BOTTOM (solid shape): 23.14,26.7 23.52,26.23 22.67,26.08 22.56,26.12 22.52,26.23 22.71,27.11
GND on BOTTOM (solid shape): 23.34,27.57 23.26,26.75 23.16,26.65 23.02,26.68 22.26,27.43 22.59,28.23
GND SIGNAL on BOTTOM (solid shape): 29.08,31.33 29.11,31.24 29.08,31.16 28.51,30.58 27.77,31.24 28.51,31.9
GND SIGNAL on BOTTOM (solid shape): 33.2,10.25 33.31,10.2 33.35,10.09 33.17,9.21 32.74,9.62 32.36,10.1
A0 on TOP (solid shape): 32.34,15.82 32.38,15.84 32.43,15.82 33.13,15.13 32.38,14.96 31.64,15.13
MODE0 on BOTTOM (solid shape): 49.84,24 49.11,23.5 48.69,23.92 48.67,24 48.69,24.08 49.11,24.5
VPHY on BOTTOM (solid shape): 11.85,20.07 11.3,19.49 10.82,19.98 10.8,20.07 10.82,20.15 11.3,20.64
VPLL on BOTTOM (solid shape): 11.71,18.31 12.09,17.84 11.22,17.69 11.11,17.74 11.06,17.86 11.28,18.73
N03059 on TOP (solid shape): 9.73,21.86 9.78,21.88 9.83,21.86 10.52,21.16 9.78,21.02 9.03,21.16

Small or netless copper shapes (teardrops, artwork), in the pictures only: 138 on TOP, 175 on BOTTOM

## Text on the board
Ref Des/Silkscreen Top: 3V3 | SCL_USB | GND | SDA_USB | 3V3IS0 | SCL_ISO | GND_SIGNAL | SDA_ISO | ATLAS HGTD | Isolated USB Programmer for LpGBT (UPL) | V2.0 2021-06 | On=L | On=OUT | 2 | Addr | 1 | 0
